# Altium PCB Generador de ozono.PcbDoc
Units mil, origin at the board's own origin, x right, y up, seen from the top; angles counter-clockwise.
Board outline 4000 x 1771 mil, 2 copper layers (Top Layer, Bottom Layer); 31 components, 24 nets, 157 pads, 8 vias.
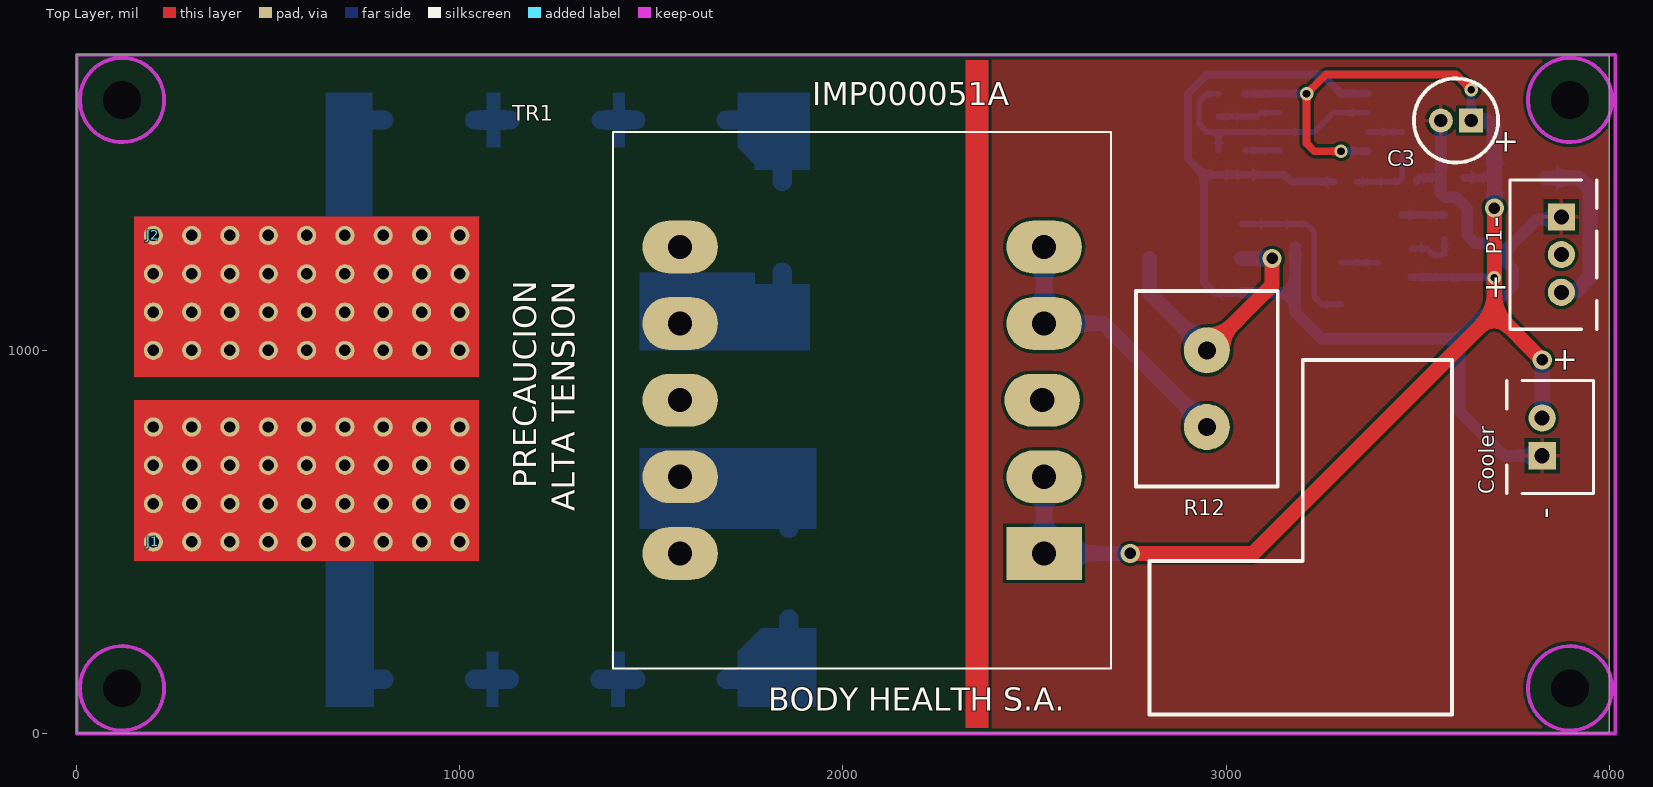
[diagram p0: Top Layer view]
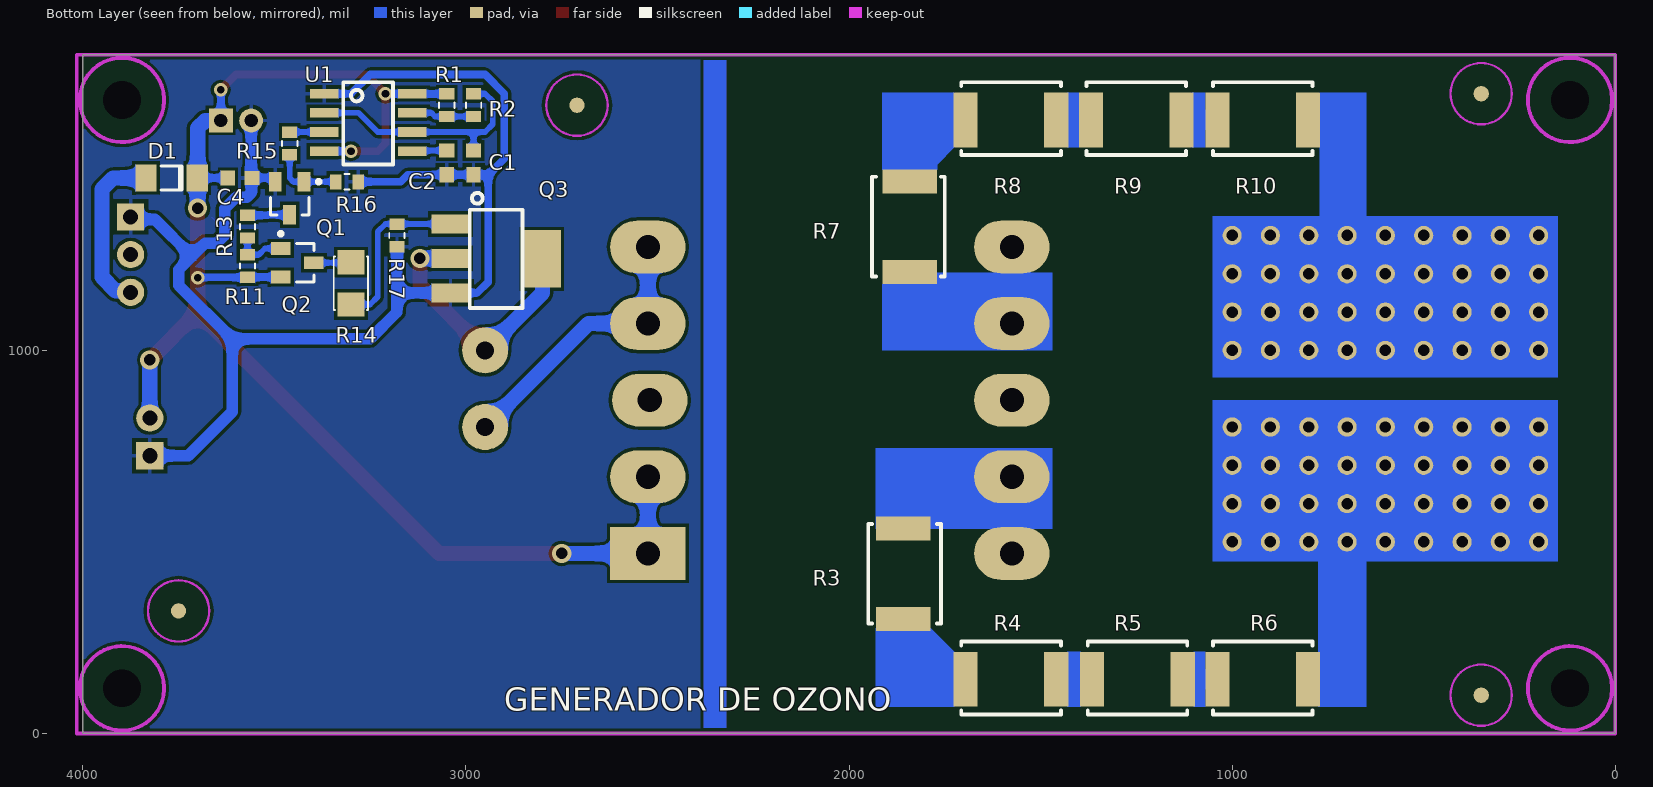
[diagram p1: Bottom Layer view, seen from below]
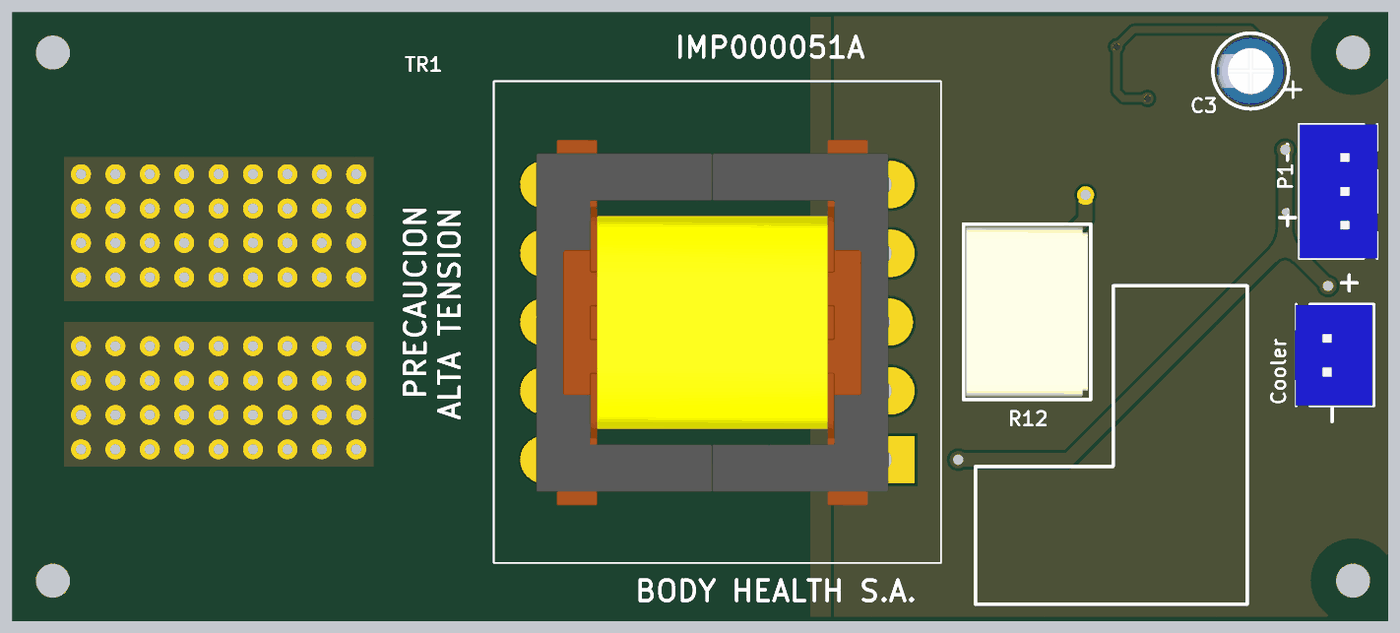
[diagram p2: 3D render of the assembled board from above, using the file's embedded part models]
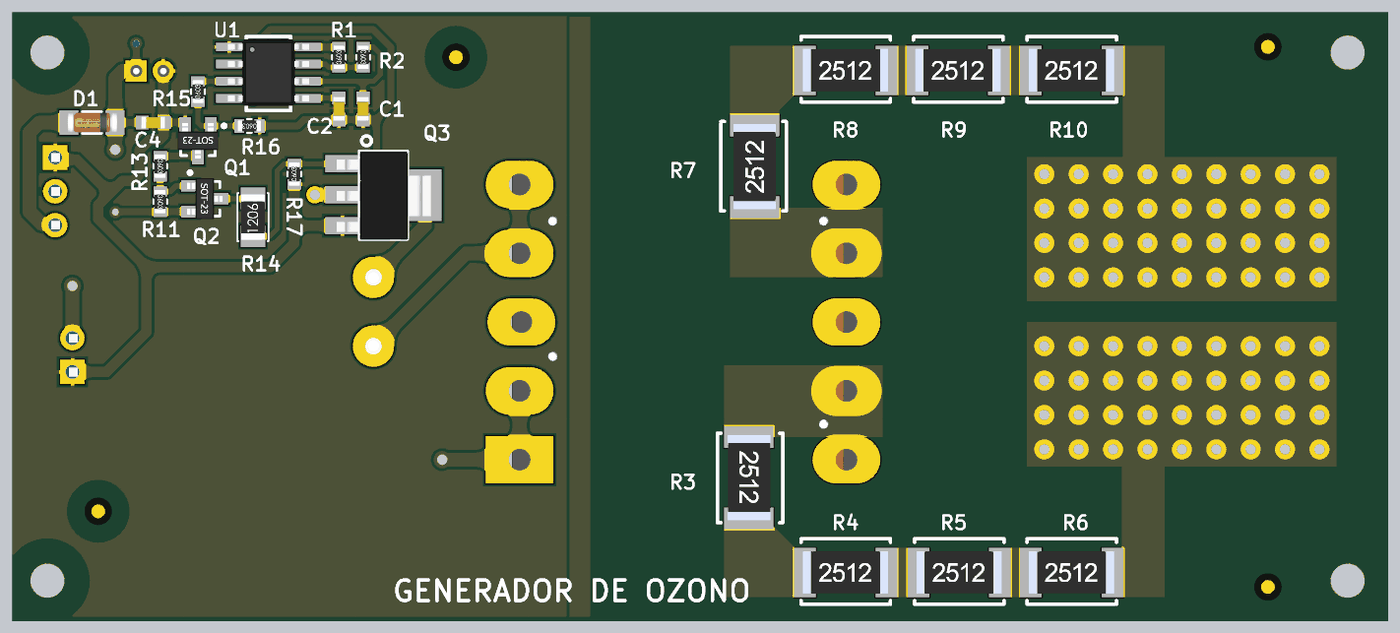
[diagram p3: 3D render of the assembled board from below, using the file's embedded part models]

## Layer stack, top to bottom
Top Solder: solder mask 0.4, Solder Resist, Dk 3.5
Top Layer: signal copper 1.4
Dielectric 1: dielectric 12.6, FR-4, Dk 4.8
Bottom Layer: signal copper 1.4
Bottom Solder: solder mask 0.4, Solder Resist, Dk 3.5

## Board outline
0,0 4000,0 4000,1771 0,1771

## Design rules (kind name [scope] priority, off if disabled: settings)
Clearance [All] p1: gap=8 ignorepadtopadclearanceinfootprint=FALSE except(0: Arc-Hole Track-Hole SMDPad-Hole THPad-Hole Via-Hole Fill-Hole Poly-Hole Region-Hole Text-Hole)
HoleSize [All] p1: absolutevalues=TRUE maxlimit=100 minlimit=16 maxpercent=80.000 minpercent=20.000
MinimumSolderMaskSliver [All] p1: minsoldermaskwidth=3
PolygonConnect [All] p1: connectstyle=Relief reliefconductorwidth=10 reliefentries=4 polygonreliefangle="90 Angle" airgapwidth=10
RoomDefinition "Generador de ozono" [InComponentClass('Generador de ozono')] p1 off: confinementstyle=ConfineIn formatcopy=TRUE lockcomponents=FALSE outline 4045,60 11645,60 11645,1580 4045,1580
RoutingVias [All] p1: holewidth=20 width=30 viastyle="Through Hole" minholewidth=16 minwidth=24 maxholewidth=24 maxwidth=50
SilkToSilkClearance [All] p1: silktosilkclearance=5
SilkToSolderMaskClearance [IsPad] p1: minsilkscreentomaskgap=0 clearancetoexposedcopper=TRUE
SolderMaskExpansion [All] p1: expansion=4 istentingtop=FALSE
Width [All] p1: maxlimit=50 minlimit=8 preferedwidth=8
26 further rules are at their usual default settings.

## Components (designator, comment, footprint, x,y, rotation, side; value= is the part's Value field where it differs from the comment)
C1 "2n2F" C_0603 2980,1490 r90 bottom
C2 "10nF" C_0603 3050,1490 r90 bottom
C3 "22uF 25V" CAP100RP 3600,1600 r180 top
C4 "100nF" C_0603 3590,1450 r0 bottom
Cooler "Cooler" B2B-XH-A_3D 3825,725 r90 top
D1 "FDLL4148" SOD-80/MLL34 3768,1450 r180 bottom
J1 "Terminacion" Terminacion 200,500 r0 top
J2 "Terminacion" Terminacion 200,1300 r0 top
P1 "IN_VCC" B3B-XH-A_3D 3875,1348.43 r270 top
Q1 "MMBT2907A-7-F" SOT23 3460,1397.09 r0 bottom
Q2 "MMBT2222A-7-F" SOT23 3440,1228.55 r270 bottom
Q3 "PBHV8215Z,115" SOT223 2990,1367 r270 bottom
R1 "10K" R_0603 3050,1640 r90 bottom
R2 "100K" R_0603 2980,1640 r270 bottom
R3 "1M" R_2512 1930,567 r270 bottom
R4 "1M" R_2512 1727,70 r180 bottom
R5 "1M" R_2512 1397,70 r180 bottom
R6 "1M" R_2512 1070,70 r180 bottom
R7 "1M" R_2512 1770,1173 r90 bottom
R8 "1M" R_2512 1727,1530 r180 bottom
R9 "1M" R_2512 1400,1530 r180 bottom
R10 "1M" R_2512 1070,1530 r180 bottom
R11 "10k" R_0603 3570,1220 r270 bottom
R12 "15" RES_CEMENTADA_5W_VERT 2950,800 r90 top
R13 "10k" R_0603 3570,1323 r270 bottom
R14 "220" R_1206 3300,1175 r90 bottom
R15 "10k" R_0603 3460,1540 r90 bottom
R16 "10K" R_0603 3310.47,1440 r0 bottom
R17 "10K" R_0603 3180,1300 r90 bottom
TR1 "Trafo generador de ozono" "TRAFO VACIO" 2525,470 r180 top
U1 "NE555DR" SOIC8 3320,1700 r180 bottom

## Footprints (in the part's own frame and the unit in brackets; to place one, negate y for a bottom-side part, rotate by r counter-clockwise, add the part's x,y. Pads: shape width x height; smd on the part's side, far side on the other; paste and mask are expansions set on the pad)
B2B-XH-A_3D [mm] "CONN HEADER XH TOP 2POS 2.5MM"
  rect 1.8x1.8 hole 1: 1(0,0)
  round 1.8 hole 1: 2(2.5,0)
  silkscreen extent -2.5,-3.4 5,2.35, body extent -2.47,-3.3 4.93,2.45, height 7
B3B-XH-A_3D [mm] "CONN HEADER XH TOP 3POS 2.5MM"
  rect 1.8x1.8 hole 1: 1(0,0)
  round 1.8 hole 1: 2(2.5,0) 3(5,0)
  silkscreen extent -2.45,-3.4 7.45,2.35, body extent -2.45,-3.4 7.45,2.35, height 7
C_0603 [mm] "Chip Capacitor, Body 1.6x0.8mm, IPC Normal Density"
  rect 1x0.95 smd: 1(-0.8,0)
  rect 0.95x1 smd: 2(0.8,0)
  body extent -0.87,-0.43 0.88,0.44, height 1.02
CAP100RP [mil] "Body diameter 5mm"
  rect 62x62 hole 35: 1(-39.37,0)
  round 62 hole 35: 2(39.37,0)
  silkscreen extent -110,-110 110,110, body extent -98,-98 98,99, height 433
R_0603 [mm] "Chip Resistor; Body 1.6 x 0.85 mm (LxW typ)"
  rect 0.75x1 smd: 1(-0.75,0) 2(0.75,0)
  silkscreen extent -0.18,-0.51 0.18,0.51, body extent -0.85,-0.4 0.85,0.4, height 0.56
R_1206 [mm] "Chip Resistor; Body 3.2 x 1.6 mm (LxW typ)"
  rect 1.6x1.8 smd: 1(-1.4,0) 2(1.4,0)
  silkscreen extent -1.78,-1.14 1.78,1.14, body extent -1.67,-0.86 1.68,0.87, height 0.85
R_2512 [mil] "Chip Resistor; Body 6.4 x 3.2 mm (LxW typ)"
  rect 63x143 smd: 1(31.5,71.5) 2(268,71.5)
  silkscreen extent 20,-20 280,170, body extent 25,10 273,134, height 22
RES_CEMENTADA_5W_VERT [mil] "RESISTENCIA DE 5W VERTICAL"
  round 120 hole 47.24: 1(0,0) 2(200,0)
  silkscreen extent -155,-185 355,185, body extent -146,-177 346,177, height 984
SOD-80/MLL34 [mm] "Metal Electrode Face (MELF) Diode; Body 3.5 x 1.7 mm (LxDia)"
  rect 1.4x1.8 smd: 1(-1.7,0) 2(1.7,0)
  silkscreen extent -0.7,-0.8 0.7,0.8, body extent -1.82,-0.8 1.88,0.8, height 1.6
SOIC8 [mil]
  rect 75x25 smd: 1(-50,-30) 2(-50,-80) 3(-50,-130) 4(-50,-180) 5(180,-180) 6(180,-130) 7(180,-80) 8(180,-30)
  silkscreen extent 0,-215 130,0, body extent -53,-201 183,-9, height 67
SOT23 [mm] "SOT-23; 3 Leads; Body 3.0 x 2.6 mm, inc. leads (LxW max)"
  rect 0.85x1.3 smd: 1(-0.95,-1.1) 2(0.95,-1.1) 3(0,1.1)
  silkscreen extent -2.05,-1.22 1.28,1.1, body extent -1.5,-1.32 1.5,1.32, height 1.08
SOT223 [mil] "SOT-223"
  rect 50x100 smd: 1(37,-50) 2(127,-50) 3(217,-50)
  rect 150x100 smd: 2(128,188)
  silkscreen extent -44,0 256,138, body extent 2,-67 258,207, height 65
Terminacion [mil]
  round 50 hole 30: ""(0,0)
"TRAFO VACIO" [mm] "Trafo de deteccion de cruce por cero (El 3D no es exacto, despues corregirlo)"
  rect 5x3.5 hole 1.6: 1(0,0)
  oval 5x3.5 hole 1.6: 1(0,-5.08) 2(0,-15.24) 2(0,-20.32) 3(24.13,-5.08) 3(24.13,0) 4(24.13,-20.32) 4(24.13,-15.24) ""(0.127,-10.16) ""(24.13,-10.16)
  silkscreen extent -4.45,-27.94 28.58,7.62, body extent -0.55,-23.62 25.45,3.38, height 21.85

## Part data
C1: library part C_2n2F_0603, "CAP CER 2200PF 50V X7R 0603"
C2: library part C_10nF_0603, "CAP CER 10000PF 50V X7R 0603"
C3: library part CAP_ALUM_22UF_25V, "CAP ALUM 22UF 20% 25V RADIAL"
C4: library part C_100nF_0603, "CAP CER 0.1UF 50V X7R 0603"
Cooler: library part JST_2.5_2, "CONN HEADER XH TOP 2POS 2.5MM"
D1: library part "Diode FDLL4148", "DIODE GEN PURP 100V 200MA LL34/SOD80/MINI MELF"
J1 J2: "Pad para terminar un camino - No es un componente"
P1: library part JST_2.5_3, "CONN HEADER XH TOP 3POS 2.5MM"
Q1: "TRANS PNP 60V 0.6A SOT23-3"
Q2: "TRANS NPN 40V 0.6A SMD SOT23-3"
Q3: "TRANS NPN 150V 2A SOT223"
R1 R11 R13 R15 R16 R17: library part R_10k_0603, "RES SMD 10K OHM 5% 1/10W 0603"
R2: library part R_100k_0603, "RES SMD 100K OHM 5% 1/10W 0603"
R3 R4 R5 R6 R7 R8 R9 R10: library part R_1M_2512, "1 MOhms ±5% 1W Chip Resistor 2512 (6432 Metric) High Voltage Thick Film"
R12: library part Resistor-15_5W, "15 Ohms ±5% 5W Through Hole Resistor Radial"
R14: library part R_220_1206, "220 Ohms ±5% 0.5W, 1/2W Chip Resistor 1206"
TR1: library part "Trafo alta tension", "Transformador RF"
U1: "IC OSC SGL TIMER 100KHZ 8-SOIC"

## Free pads (board coordinates)
  round 40 smd far side paste-30 mask+20: 0(350,100) 0(350,1670) 0(2710,1640) 0(3750,320)
  round 50 hole 30: 0(700,1100) ""(200,600) ""(200,700) ""(200,800) ""(200,1000) ""(200,1100) ""(200,1200) ""(300,500) ""(300,600) ""(300,700) ""(300,800) ""(300,1000) ""(300,1100) ""(300,1200) ""(300,1300) ""(400,500) ""(400,600) ""(400,700) ""(400,800) ""(400,1100) ""(400,1200) ""(400,1300) ""(500,500) ""(500,600) ""(500,700) ""(500,800) ""(500,1000) ""(500,1100) ""(500,1200) ""(500,1300) ""(600,500) ""(600,600) ""(600,700) ""(600,800) ""(600,1000) ""(600,1100) ""(600,1200) ""(600,1300) ""(700,500) ""(700,600) ""(700,700) ""(700,800) ""(700,1000) ""(700,1200) ""(700,1300) ""(800,500) ""(800,600) ""(800,700) ""(800,800) ""(800,1000) ""(800,1100) ""(800,1200) ""(800,1300) ""(900,500) ""(900,600) ""(900,700) ""(900,800) ""(900,1000) ""(900,1100) ""(900,1200) ""(900,1300) ""(1000,500) ""(1000,600) ""(1000,700) ""(1000,800) ""(1000,1000) ""(1000,1100) ""(1000,1200) ""(1000,1300)
  round 0 hole 98.43: ""(118.11,118.11) ""(118.11,1653.54) ""(3897.64,118.11) ""(3897.64,1653.54)
  round 50 hole 30 mask+4: ""(400,1000)

## Via types
v1: diameter 35, hole 20, Top Layer to Bottom Layer, tented both sides, 4 vias
v2: diameter 50, hole 30, Top Layer to Bottom Layer, tented both sides, 3 vias
v3: diameter 50, hole 30, Top Layer to Bottom Layer, 1 vias

## Nets (pads, with @x,y where several pads share a name; then routed paths per layer and width w, separated by ;. In a path a pad name is that pad's centre, name@x,y a point inside that pad or via, vN(x,y) a via of type N, cw(c..) or ccw(c..) an arc to the next point about the centre after c; other vN are vias at no path point)
12v: C3.1 C4.2 Cooler.2 D1.2 Q2.2 R1.2 R11.2 TR1.1 U1.4 U1.8 | length 3815.8
  Top Layer w20: v1(3300,1520) 3230,1520 3210,1540 v1(3210,1670) 3260,1720 3600,1720 v1(3640,1680)
  Top Layer w40: v2(2750,470) 3070,470 3700,1100 ; v2(3700.54,1371.25) 3700.54,1190.54 v1(3700,1190) 3700,1100 ; v2(3825,975) 3700,1100
  Bottom Layer w20: R1.2 3209.53,1669.53 v1(3210,1670) ; v1(3300,1520) U1.4 ; Q2.2 3569.32,1191.15 R11.2 v1@3700,1190.47 ; C4.2 3698.93,1450 3700,1451.07 D1.2 D1.2@3700.54,1449.46 ; C3.1 v1@3639.37,1680 ; v2(3700.54,1371.25) v2@3700.54,1381.96
  Bottom Layer w40: TR1.1@2525,670 2525,470 v2(2750,470) ; C3.1 3680,1600 3700,1580 D1.2@3700,1451.07 ; v2@3700.54,1381.96 D1.2@3700.54,1449.46 ; Cooler.2 v2(3825,975)
Frecuencia: R15.2 U1.3 | length 90.2
  Bottom Layer w15: U1.3 3459.53,1570 R15.2
GND: C1.1 C2.1 C3.2 C4.1 Cooler.1 P1.1 Q1.2 Q3.3 R16.1 R17.1 U1.1 | length 3713.1
  Bottom Layer w20: Q3.3 2970,1150 2941.5,1178.5 2941.5,1458.5 ; R16.1 3170,1440 3151.5,1458.5 C2.1 C1.1 2941.5,1458.5 ; U1.1 3300,1670 3250,1720 2950,1720 2900,1670 2900,1500 2941.5,1458.5 ; Q1.2 3497.4,1443.9 3504.13,1450.63 3560.63,1450.63 C4.1@3560,1450
  Bottom Layer w30: Q3.3 3180,1150 ; R17.1 3180,1150 ; C4.1@3560,1450 3560,1411.72 3571.72,1400 3600,1400 3630,1370 3630,1300 3650,1280 3680,1280 3715,1245 ; C4.1@3560.63,1450.63 C3.2 ; Cooler.1 3725,725 3610,840 3610,1030 ; P1.1 3868.72,1342.14 3812.14,1342.14 3715,1245 ; 3180,1150 3180,1100 3250,1030 3610,1030 ; 3610,1030 3750,1170 3750,1210 3715,1245
NetC1_2: C1.2 R2.1 U1.2 U1.6 | length 635.6
  Bottom Layer w15: C1.2 2980,1570 ; R2.1 2949.53,1669.53 2930,1650 2930,1590 2950,1570 2980,1570 ; U1.2 3280,1620 3230,1570 U1.6 2980,1570
NetC2_2: C2.2 U1.5 | length 90.6
  Bottom Layer w15: C2.2 3138.5,1521.5 U1.5
NetD1_1: D1.1 P1.3 | length 448.1
  Bottom Layer w40: D1.1 3920.71,1450 3950,1420.71 3950,1191.3 3914.27,1155.57 P1.3@3878.99,1155.57
  Bottom Layer w50: P1.3 P1.3@3878.99,1155.57
NetJ1: J1. pad.@200,600 pad.@200,700 pad.@200,800 pad.@300,500 pad.@300,600 pad.@300,700 pad.@300,800 pad.@400,500 pad.@400,600 pad.@400,700 pad.@400,800 pad.@500,500 pad.@500,600 pad.@500,700 pad.@500,800 pad.@600,500 pad.@600,600 pad.@600,700 pad.@600,800 pad.@700,500 pad.@700,600 pad.@700,700 pad.@700,800 pad.@800,500 pad.@800,600 pad.@800,700 pad.@800,800 pad.@900,500 pad.@900,600 pad.@900,700 pad.@900,800 pad.@1000,500 pad.@1000,600 pad.@1000,700 pad.@1000,800 R6.2 | length 949.7
  Bottom Layer w50: J1. 700,500 700,160 718.5,141.5 R6.2
NetJ2: J2. pad.0@700,1100 pad.@200,1000 pad.@200,1100 pad.@200,1200 pad.@300,1000 pad.@300,1100 pad.@300,1200 pad.@300,1300 pad.@400,1000 pad.@400,1100 pad.@400,1200 pad.@400,1300 pad.@500,1000 pad.@500,1100 pad.@500,1200 pad.@500,1300 pad.@600,1000 pad.@600,1100 pad.@600,1200 pad.@600,1300 pad.@700,1000 pad.@700,1200 pad.@700,1300 pad.@800,1000 pad.@800,1100 pad.@800,1200 pad.@800,1300 pad.@900,1000 pad.@900,1100 pad.@900,1200 pad.@900,1300 pad.@1000,1000 pad.@1000,1100 pad.@1000,1200 pad.@1000,1300 R10.2 | length 890.9
  Bottom Layer w50: J2. 700,1300 700,1580 721.5,1601.5 R10.2
NetQ1_1: Q1.1 R15.1 R16.2 | length 184.6
  Bottom Layer w15: R16.2 3340.4,1440.4 Q1.1 3450.4,1440.4 3460,1450 R15.1
NetQ1_3: Q1.3 R13.1 | length 110.5
  Bottom Layer w20: Q1.3 3516.21,1353.79 3517.47,1352.53 R13.1
NetQ2_1: Q2.1 R11.1 R13.2 | length 134.4
  Bottom Layer w15: Q2.1 3524.04,1265.96 3540.47,1249.53 R11.1 R13.2@3570,1290.47
NetQ2_3: Q2.3 R14.2 | length 97.3
  Bottom Layer w15: R14.2 3301.56,1228.55 Q2.3
NetQ3_1: Q3.1 R14.1 R17.2 | length 446.6
  Bottom Layer w15: Q3.1 3170,1330 3210,1330 3230,1310 3230,1140 3250.12,1119.88 R14.1
NetQ3_2: Q3.2 R12.2 | length 692.5
  Top Layer w40: R12.2 3120,1170 v3(3120,1240)
  Bottom Layer w40: Q3.2@2800,1240 2800,1150 R12.2 ; Q3.2@3040,1240 v3(3120,1240)
NetR1_1: R1.1 R2.2 U1.7 | length 163.9
  Bottom Layer w15: R2.2 R1.1 3080.47,1610.47 3090,1620 U1.7
NetR3_1: R3.1 TR1.3 | length 589.6
  Bottom Layer w50: TR1.3@1575,470 1575,670 1810,670 1858.5,621.5 R3.1
NetR3_2: R3.2 R4.1 | length 287.1
  Bottom Layer w50: R4.1 1801.5,141.5 1858.5,198.5 R3.2
NetR4_2: R4.2 R5.1 | length 93.5
  Bottom Layer w50: R5.1 R4.2
NetR5_2: R5.2 R6.1 | length 90.5
  Bottom Layer w50: R6.1 R5.2
NetR7_1: R7.1 TR1.4 | length 570.8
  Bottom Layer w50: TR1.4@1575,1270 1575,1070 1790,1070 1841.5,1121.5 R7.1
NetR7_2: R7.2 R8.1 | length 281.3
  Bottom Layer w50: R8.1 1798.5,1601.5 1841.5,1558.5 R7.2
NetR8_2: R8.2 R9.1 | length 90.5
  Bottom Layer w50: R9.1 R8.2
NetR9_2: R9.2 R10.1 | length 93.5
  Bottom Layer w50: R10.1 R9.2
NetR12_1: R12.1 TR1.2 | length 736.8
  Bottom Layer w40: TR1.2@2525,1270 2525,1070 2680,1070 R12.1
pads on no net: P1.2 TR1.

## Polygon pours and split planes (outlines as drawn)
GND on Top Layer "Top Layer - GND" (solid, remove dead copper, pour order 10): 0,0 4000,0 4000,1771 0,1771
GND on Bottom Layer "Bottom Layer - GND" (solid, remove dead copper, pour order 12): 0,0 4000,0 4000,1771 0,1771

## Keep-outs
Bottom Layer:
  circle w6: c2710,1640 r80
  circle w6: c3750,320 r80
  circle w6: c350,1670 r80
  circle w6: c350,100 r80
Keep-Out Layer:
  circle w10: c118.11,118.11 r110
  circle w10: c118.11,1653.54 r110
  circle w10: c3897.64,1653.54 r110
  circle w10: c3897.64,118.11 r110
  lines w10: 0,0 4015.75,0 4015.75,1771.65 0,1771.65 0,0

## Other copper
Top Layer:
  rectangle: 2320,13.78 2380,1757.87
  rectangle net NetJ1: 150,450 1050,870
  rectangle net NetJ2: 150,930 1050,1350
Bottom Layer:
  rectangle: 2320,13.78 2380,1757.87
  region net NetJ1: 150,870 1050,870 1050,450 150,450
  region net NetJ2: 1050,930 1050,1350 150,1350 150,930
  region net NetR7_1: 1470,1202 1470,1000 1913,1000 1913,1173 1770,1173 1770,1202
  region net NetR7_2: 1770,1472 1770,1485 1725,1530 1725,1673 1913,1673 1913,1472
  region net NetR8_2: 1400,1673 1400,1530 1430,1530 1430,1673
  region net NetR9_2: 1070,1673 1070,1530 1105,1530 1105,1673
  region net NetR5_2: 1070,70 1100,70 1100,213 1070,213
  region net NetR4_2: 1395,213 1395,70 1430,70 1430,213
  region net NetR3_2: 1725,213 1787,275 1930,275 1930,70 1725,70
  region net NetJ2: 771,1673 650,1673 650,1290 771,1290
  region net NetJ1: 650,465 650,70 775,70 775,465
  region net NetR3_1: 1470,535 1930,535 1930,745 1470,745

## Silkscreen, mask and mechanical layers (free items; w line width, h text height)
Top Overlay:
  lines w10: 2800,50 3590,50 3590,190 3590,210 3590,975 3200,975 3200,450 2800,450 2800,50
  text "IMP000051A" at 1920,1640 h60
  text "-" at 3730,1320 h60 r90
  text "+" at 3730,1130 h60 r90
  text "+" at 3910,940 h60 r90
  text "ALTA TENSION" at 1300,580 h60 r90
  text "-" at 3860,560 h60 r90
  text "BODY HEALTH S.A." at 1805,60 h60
Bottom Overlay:
  text "GENERADOR DE OZONO" at 2900,60 h60
Drill Drawing:
  text ".LEGEND" at 4200,200 h60
  text "Drill Drawing." at 4200,100 h60

## Text inside footprints (layer, text, board x,y; h text height)
C3: Top Overlay "+" at 3765.07,1568.99 h60 r180
TR1: Top Overlay "PRECAUCION" at 1200,640 h60 r90